# EAGLE board Escorna_CPU_1_01 (EAGLE 6.4)
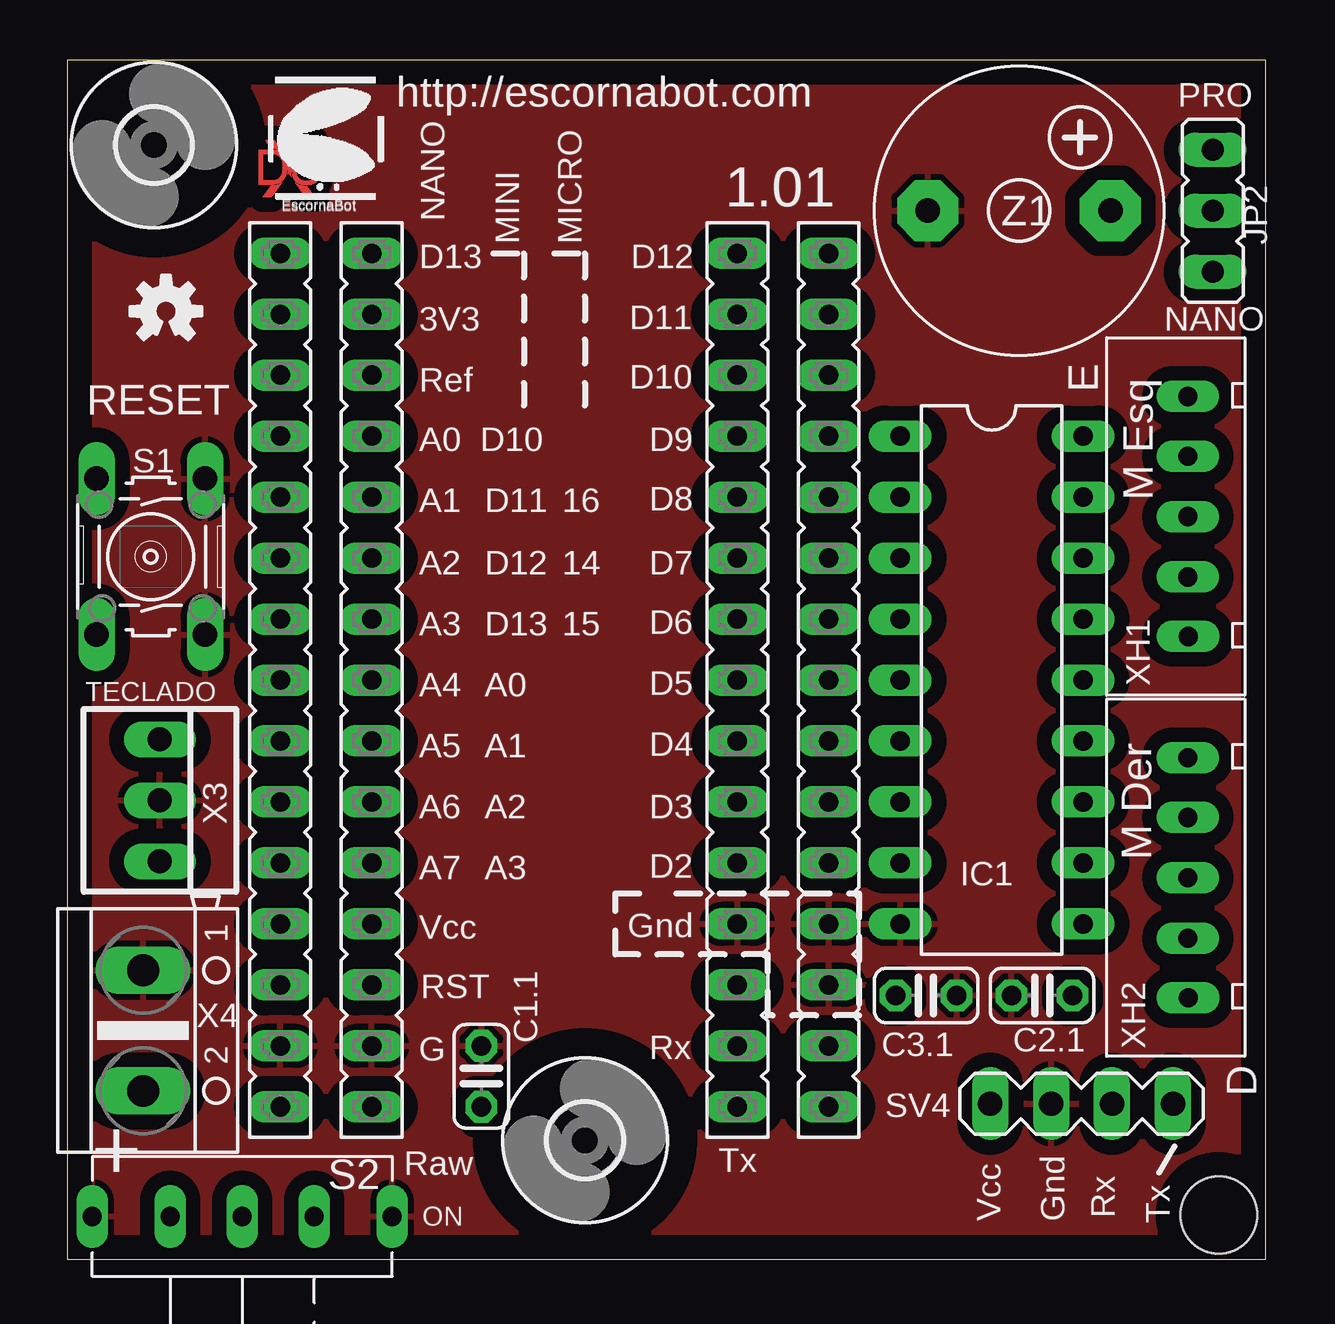
[diagram p0: board, top side]
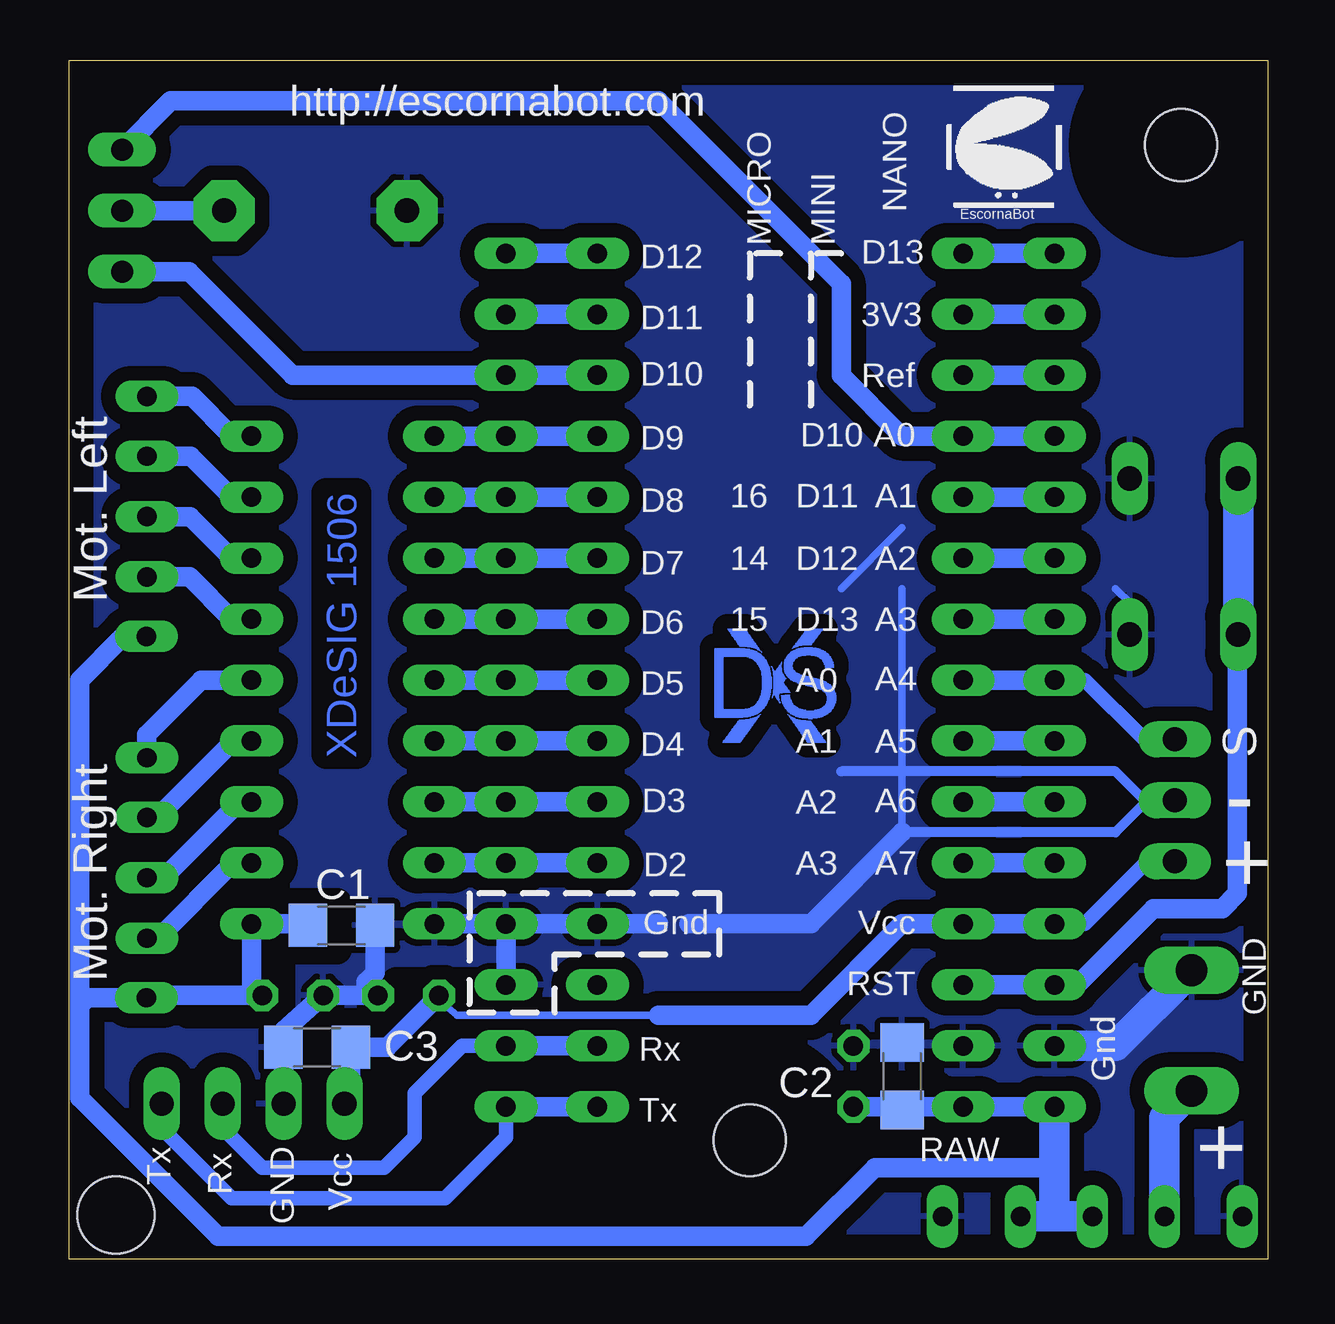
[diagram p1: board, bottom side, seen from below]

Size 49.96 x 49.96 mm. Coordinates in mm from the lower left corner, seen from the top.
Outline: 0,0 49.96,0 49.96,49.97 0,49.97 0,0
Copper layers (1*16): Top 0.035mm / dielectric 1.5mm / Bottom 0.035mm
Design rules "default": minimum track width 10mil, minimum drill 24mil, track to track 8mil, track to pad 8mil, pad to pad 8mil, via to via 8mil, smd to smd 8mil, copper to edge 40mil, drill to drill 8mil, minimum pad ring 10mil, minimum via ring 8mil, stop-mask expansion 4mil, vias tented up to drill 0mil, thermal gap 10mil
Net classes: 0 default: clearance 0.355 mm
Holes 3.2 mm at 48.01,1.84
bRestrict: area 37.1,7.9 to 41,9.8; area 36.9,5.1 to 40.8,7; area 38.8,12.9 to 42.7,14.9; area 1.5,17.3 to 3.5,21.1; area 5.3,17.3 to 7.3,21.1; area 13.8,5.3 to 17.7,7.2; area 41.1,10.2 to 45,12.2; area 32.4,9.6 to 36.3,11.6

## Footprints (pad centres in the part's own frame; a part is rotated, then mirrored left to right if it is on the bottom)
C1206 = smd 1.6 x 1.8: 1 -1.4,0; 2 1.4,0
C025-024X044 = drill 0.813 octagon: 1 -1.27,0; 2 1.27,0
3,0 = hole 3: 0,0
DIL18 = drill 0.813 long: 1 -10.16,-3.81; 2 -7.62,-3.81; 3 -5.08,-3.81; 4 -2.54,-3.81; 5 0,-3.81; 6 2.54,-3.81; 7 5.08,-3.81; 8 7.62,-3.81; 9 10.16,-3.81; 10 10.16,3.81; 11 7.62,3.81; 12 5.08,3.81; 13 2.54,3.81; 14 0,3.81; 15 -2.54,3.81; 16 -5.08,3.81; 17 -7.62,3.81; 18 -10.16,3.81
JP2 = drill 0.914 long: 1 -2.54,0; 2 0,0; 3 2.54,0
FE15 = drill 0.813 long: 1 -17.78,0; 2 -15.24,0; 3 -12.7,0; 4 -10.16,0; 5 -7.62,0; 6 -5.08,0; 7 -2.54,0; 8 0,0; 9 2.54,0; 10 5.08,0; 11 7.62,0; 12 10.16,0; 13 12.7,0; 14 15.24,0; 15 17.78,0
B3F-10XX = drill 1.016 long: 1 -3.251,2.261; 2 3.251,2.261; 3 -3.251,-2.261; 4 3.251,-2.261
SK-12F14-G = drill 0.8 long: P$1 0,0; P$2 3,0; P$3 -3,0; P$4 -6.25,0; P$5 6.25,0
MA04-1 = drill 1.016 long: 1 -3.81,0; 2 -1.27,0; 3 1.27,0; 4 3.81,0
22-23-2031 = drill 1 long: 1 -2.54,0; 2 0,0; 3 2.54,0
AK500/2 = drill 1.321 long: 1 -2.515,0; 2 2.515,0
B5B-XH-A = drill 0.8 long: P$1 -5.17,-0.19; P$2 -2.69,-0.175; P$3 -0.175,-0.175; P$4 2.34,-0.175; P$5 4.83,-0.175
F/CM12P = drill 1.016 pad 2.54 octagon: + 3.81,0; - -3.81,0

## Placement (x,y rotation side)
C1  100nF  [C1206]  38.61,13.91 0 bottom
C1.1  [C025-024X044]  17.27,7.62 90 top
C2  100nF  [C1206]  15.24,7.62 270 bottom
C2.1  [C025-024X044]  40.64,10.99 0 top
C3  100nF  [C1206]  39.62,8.83 0 bottom
C3.1  [C025-024X044]  35.81,10.99 180 top
H1  MOUNT-HOLE3.0  [3,0]  3.62,46.42 0 top
H2  MOUNT-HOLE3.0  [3,0]  21.59,4.95 0 top
IC1  ULN2803  [DIL18]  38.54,24.13 270 top
JP2  [JP2]  47.75,43.69 270 top
LOGO1  OSHW-LOGOS  [OSHW-LOGO-S]  4.13,39.5 0 top
PH1  [FE15]  27.94,24.13 90 top
PH2  [FE15]  12.7,24.13 90 top
PH3  [FE15]  31.75,24.13 90 top
PH4  [FE15]  8.89,24.13 90 top
S1  [B3F-10XX]  3.49,29.27 270 top
S2  [SK-12F14-G]  7.3,1.78 0 top
SV4  [MA04-1]  42.29,6.48 180 top
U$1  ESCORNABOT  [ESCORNA_PEQUE]  13.46,43.75 0 bottom
U$2  ESCORNABOT  [ESCORNA_PEQUE]  8.32,44.13 0 top
U$3  XDESIG  [XDESIG_CU]  23.05,21.53 0 bottom
U$5  ESCORNABOT  [ESCORNA_PEQUE]  8.32,44.07 0 top
U$6  XDESIG  [XDESIG_CU_2]  8,44.26 0 top
X3  22-23-2031  [22-23-2031]  3.87,19.11 270 top
X4  [AK500/2]  3.17,9.53 270 top
XH1  [B5B-XH-A]  46.55,31.11 90 top
XH2  [B5B-XH-A]  46.55,16.07 90 top
Z1  F/CM12P  [F/CM12P]  39.69,43.69 0 top

## Library data of the parts
C1 C1.1 C2 C2.1 C3 C3.1 = rcl
H1 H2 = holes
IC1 = uln-udn
JP2 = jumper
LOGO1 = SparkFun-Aesthetics
PH1-PH4 = con-lsta; OC_FARNELL: unknown; OC_NEWARK: unknown
S1 = switch-omron; MPN: B3F-1000; OC_FARNELL: 176432; OC_NEWARK: 36M3542
S2 U$1 U$5 = escorna
SV4 = con-lstb; OC_FARNELL: unknown; OC_NEWARK: unknown
U$2 = Logo_escorna
U$3 U$6 = xdesig
X3 = con-molex; MF: MOLEX; MPN: 22-23-2031; OC_FARNELL: 1462950; OC_NEWARK: 30C0862
X4 = con-ptr500; OC_FARNELL: unknown; OC_NEWARK: unknown
XH1 XH2 = con-jst
Z1 = buzzer; OC_FARNELL: unknown; OC_NEWARK: unknown

## Nets
3V3: PH2.14 PH4.14
5V: C3.1.2 C3.2 PH2.4 PH4.4 SV4.4 X3.3
A0: JP2.1 PH2.12 PH4.12
A1: PH2.11 PH4.11
A2: PH2.10 PH4.10
A3: PH2.9 PH4.9
A4: PH2.8 PH4.8 X3.1
A5: PH2.7 PH4.7
A6: PH2.6 PH4.6
A7: PH2.5 PH4.5
AREF: PH2.13 PH4.13
D2: IC1.8 PH1.5 PH3.5
D3: IC1.7 PH1.6 PH3.6
D4: IC1.6 PH1.7 PH3.7
D5: IC1.5 PH1.8 PH3.8
D6: IC1.4 PH1.9 PH3.9
D7: IC1.3 PH1.10 PH3.10
D8: IC1.2 PH1.11 PH3.11
D9: IC1.1 PH1.12 PH3.12
D10: JP2.3 PH1.13 PH3.13
D11: PH1.14 PH3.14
D12: PH1.15 PH3.15
D13: PH2.15 PH4.15
GND: C1.1.2 C1.2 C2.1 C2.1.1 C3.1 C3.1.1 IC1.9 PH1.4 PH2.2 PH3.3 PH3.4 PH4.2 S1.1 S1.2 S2.P$4 S2.P$5 SV4.3 X3.2 X4.1 Z1.-
MD1: IC1.14 XH2.P$5
MD2: IC1.13 XH2.P$4
MD3: IC1.12 XH2.P$3
MD4: IC1.11 XH2.P$2
ME1: IC1.18 XH1.P$5
ME2: IC1.17 XH1.P$4
ME3: IC1.16 XH1.P$3
ME4: IC1.15 XH1.P$2
N$2: JP2.2 Z1.+
N$3: S2.P$3 X4.2
RAW: C1.1 C1.1.1 C2.1.2 C2.2 IC1.10 PH2.1 PH4.1 S2.P$1 S2.P$2 XH1.P$1 XH2.P$1
RST: PH2.3 PH4.3 S1.3 S1.4
RX: PH1.2 PH3.2 SV4.2
TX: PH1.1 PH3.1 SV4.1

## Tracks (layer width: path | path; a pad name or v marks a point on that pad's centre or on a via)
3V3
  Bottom 0.813: PH2.14 PH4.14
5V
  Bottom 0.305: 25.4,10.16 33.78,10.16 34.54,10.79 C3.1.2
  Bottom 0.61: PH4.4 7.62,13.97 5.02,16.57 X3.3
  Bottom 0.813: 25.4,10.16 19.05,10.16 15.24,13.97 PH2.4 PH4.4 | SV4.4 38.22,7.18 C3.2 36.7,8.83 C3.1.2
A0
  Bottom 0.813: JP2.1 45.72,48.26 25.4,48.26 17.78,40.64 17.78,36.83 15.24,34.29 PH2.12 PH4.12
A1
  Bottom 0.813: PH2.11 PH4.11
A2
  Bottom 0.813: PH2.10 PH4.10
A3
  Bottom 0.813: PH2.9 PH4.9
A4
  Bottom 0.406: 7.62,24.13 PH4.8
  Bottom 0.61: X3.1 5.14,21.65 7.62,24.13
  Bottom 0.813: PH2.8 PH4.8
A5
  Bottom 0.813: PH2.7 PH4.7
A6
  Bottom 0.813: PH2.6 PH4.6
A7
  Bottom 0.813: PH4.5 PH2.5
AREF
  Bottom 0.813: PH2.13 PH4.13
D2
  Bottom 0.813: IC1.8 PH3.5 PH1.5
D3
  Bottom 0.813: IC1.7 PH3.6 PH1.6
D4
  Bottom 0.813: IC1.6 PH3.7 PH1.7
D5
  Bottom 0.813: IC1.5 PH3.8 PH1.8
D6
  Bottom 0.813: IC1.4 PH3.9 PH1.9
D7
  Bottom 0.813: IC1.3 PH3.10 PH1.10
D8
  Bottom 0.813: IC1.2 PH3.11 PH1.11
D9
  Bottom 0.813: IC1.1 PH3.12 PH1.12
D10
  Bottom 0.813: JP2.3 44.96,41.15 40.64,36.83 PH3.13 PH1.13
D11
  Bottom 0.813: PH3.14 PH1.14
D12
  Bottom 0.813: PH3.15 PH1.15
D13
  Bottom 0.813: PH2.15 PH4.15
GND
  Bottom 0.305: S1.2 5.75,27.34 6.35,27.94 | 15.24,27.94 15.24,17.91 | 17.78,27.94 15.24,30.48
  Bottom 0.406: X3.2 5.14,19.11 6.35,20.32 17.78,20.32 | 3.81,19.05 5.08,19.05 6.35,17.78 15.24,17.78 15.24,17.91
  Bottom 0.813: PH3.4 IC1.9 | PH3.4 PH3.3 | 24.13,13.97 19.05,13.97 15.24,17.78 | SV4.3 C3.1 41.02,8.96 41.02,9.53 C2.1.1 37.66,10.99 37.59,11.05 37.59,11.56 37.21,11.94 37.21,14.03 37.27,14.1 | PH3.4 PH1.4 25.4,13.97
  Bottom 1.27: PH4.2 6.33,8.89 X4.1
  pour Bottom (isolate 0.61): 0.06,49.85 50.1,49.85 50.16,-0.38 0.25,0
  pour Top (isolate 0.61): 0,49.53 49.85,49.53 49.85,0.06 0,0.06
MD1
  Bottom 0.813: IC1.14 44.45,24.13 46.72,21.86 XH2.P$5
MD2
  Bottom 0.813: XH2.P$4 46.3,18.41 43.18,21.53 42.42,21.53 IC1.13
MD3
  Bottom 0.813: IC1.12 42.86,19.05 46.16,15.75 46.58,15.75 XH2.P$3
MD4
  Bottom 0.813: XH2.P$2 46.25,13.38 43.12,16.51 IC1.11
ME1
  Bottom 0.813: IC1.18 43.18,34.29 44.84,35.95 XH1.P$5
ME2
  Bottom 0.813: XH1.P$4 44.88,33.45 43.18,31.75 IC1.17
ME3
  Bottom 0.813: XH1.P$3 44.91,30.94 43.18,29.21 IC1.16
ME4
  Bottom 0.813: XH1.P$2 44.94,28.43 43.18,26.67 IC1.15
N$2
  Bottom 0.813: JP2.2 Z1.+
N$3
  Bottom 1.27: S2.P$3 4.3,5.88 X4.2
RAW
  Bottom 0.61: 49.44,10.64 49.53,10.73
  Bottom 0.813: C1.1 40.07,13.97 IC1.10 42.35,11.43 C2.1.2 46.65,10.99 XH2.P$1 49.19,10.9 49.44,10.64 | XH1.P$1 47.72,25.95 49.53,24.13 49.53,10.73 49.53,6.73 43.75,0.95 19.24,0.95 16.38,3.81 8.89,3.81 | C1.1.1 15.37,6.35 C2.2 15.11,6.35 PH2.1 PH4.1
  Bottom 1.27: S2.P$1 8.89,1.78 | 8.89,1.78 S2.P$2 | PH4.1 8.89,3.81 8.89,1.78
RST
  Bottom 0.813: S1.4 1.27,25.98 1.27,15.24 1.91,14.61 4.76,14.61 7.94,11.43 PH4.3 PH2.3
  Bottom 1.27: S1.3 S1.4
RX
  Bottom 0.61: SV4.2 43.56,5.46 41.91,3.81 36.83,3.81 35.56,5.08 35.56,6.92 33.59,8.89 PH3.2
  Bottom 0.813: PH3.2 PH1.2
TX
  Bottom 0.61: PH3.1 31.75,5.08 34.29,2.54 43.18,2.54 46.1,5.46 SV4.1
  Bottom 0.813: PH3.1 PH1.1

## Text on the board
Bottom: XDeSIG 1506
tPlace: http://escornabot.com | PRO | 1.01 | NANO | MINI | MICRO | D13 | D12 | 3V3 | D11 | NANO | RESET | Ref | D10 | E | A0 | D10 | D9 | M Esq | A1 | D11 | 16 | D8 | A2 | D12 | 14 | D7 | A3 | D13 | 15 | D6 | TECLADO | A4 | A0 | D5 | A5 | A1 | D4 | A6 | A2 | D3 | M Der | A7 | A3 | D2 | Vcc | Gnd | RST | G | Rx | D | Tx | + | Raw | Tx | Vcc | Gnd | Rx | ON
bPlace: http://escornabot.com | NANO | MINI | MICRO | D13 | D12 | 3V3 | D11 | Ref | D10 | A0 | D10 | D9 | A1 | D11 | 16 | D8 | A2 | D12 | 14 | D7 | Mot. Left | A3 | D13 | 15 | D6 | A4 | A0 | D5 | S | A5 | A1 | D4 | A6 | A2 | D3 | - | A7 | A3 | D2 | + | Vcc | Gnd | GND | RST | Mot. Right | Gnd | Rx | Tx | RAW | GND | Tx | Vcc | Rx | +
Document: Creative Commons Recoñecemento 4.0 Internacional (CC BY 4.0)